# Altium PCB shield_can-display.PcbDoc (part 1 of 2)
Units mm, origin at the board's own origin, x right, y up, seen from the top; angles counter-clockwise.
Board outline 185 x 125 mm, 2 copper layers (Top Layer, Bottom Layer), stack 1.57 mm thick; 102 components, 185 nets, 477 pads, 180 vias.
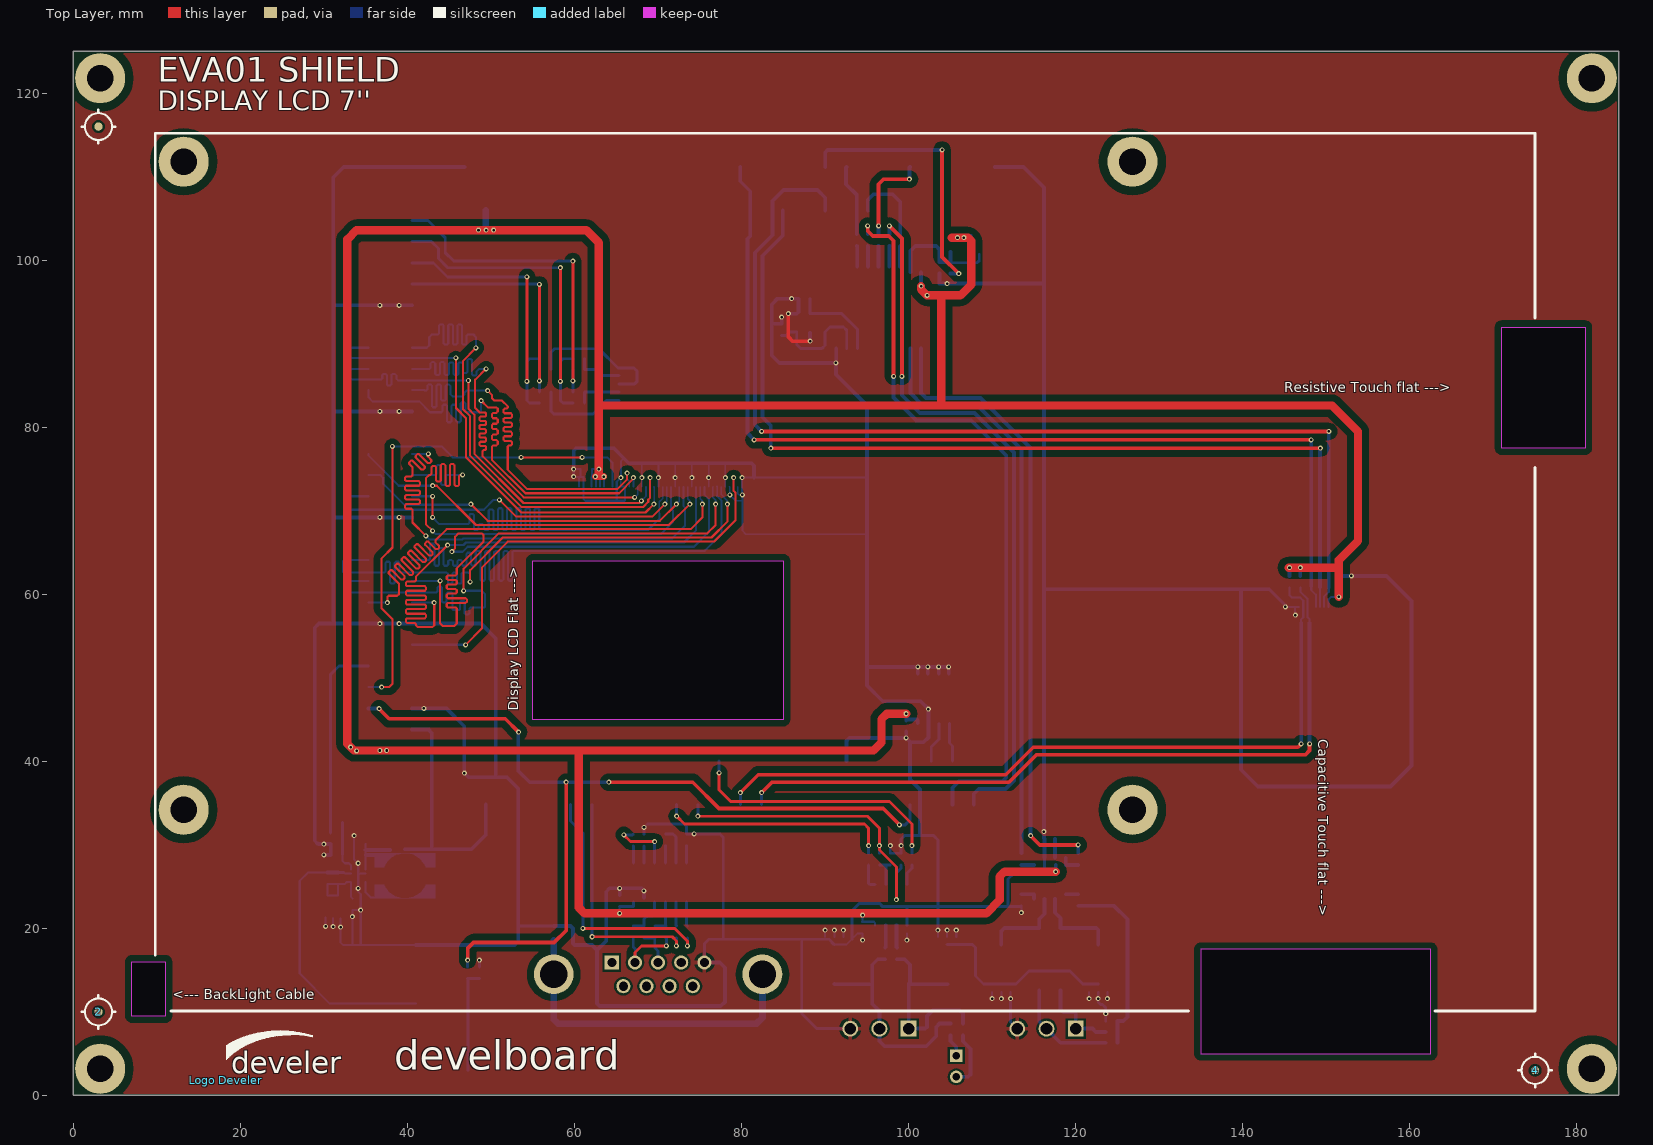
[diagram p0: Top Layer view]
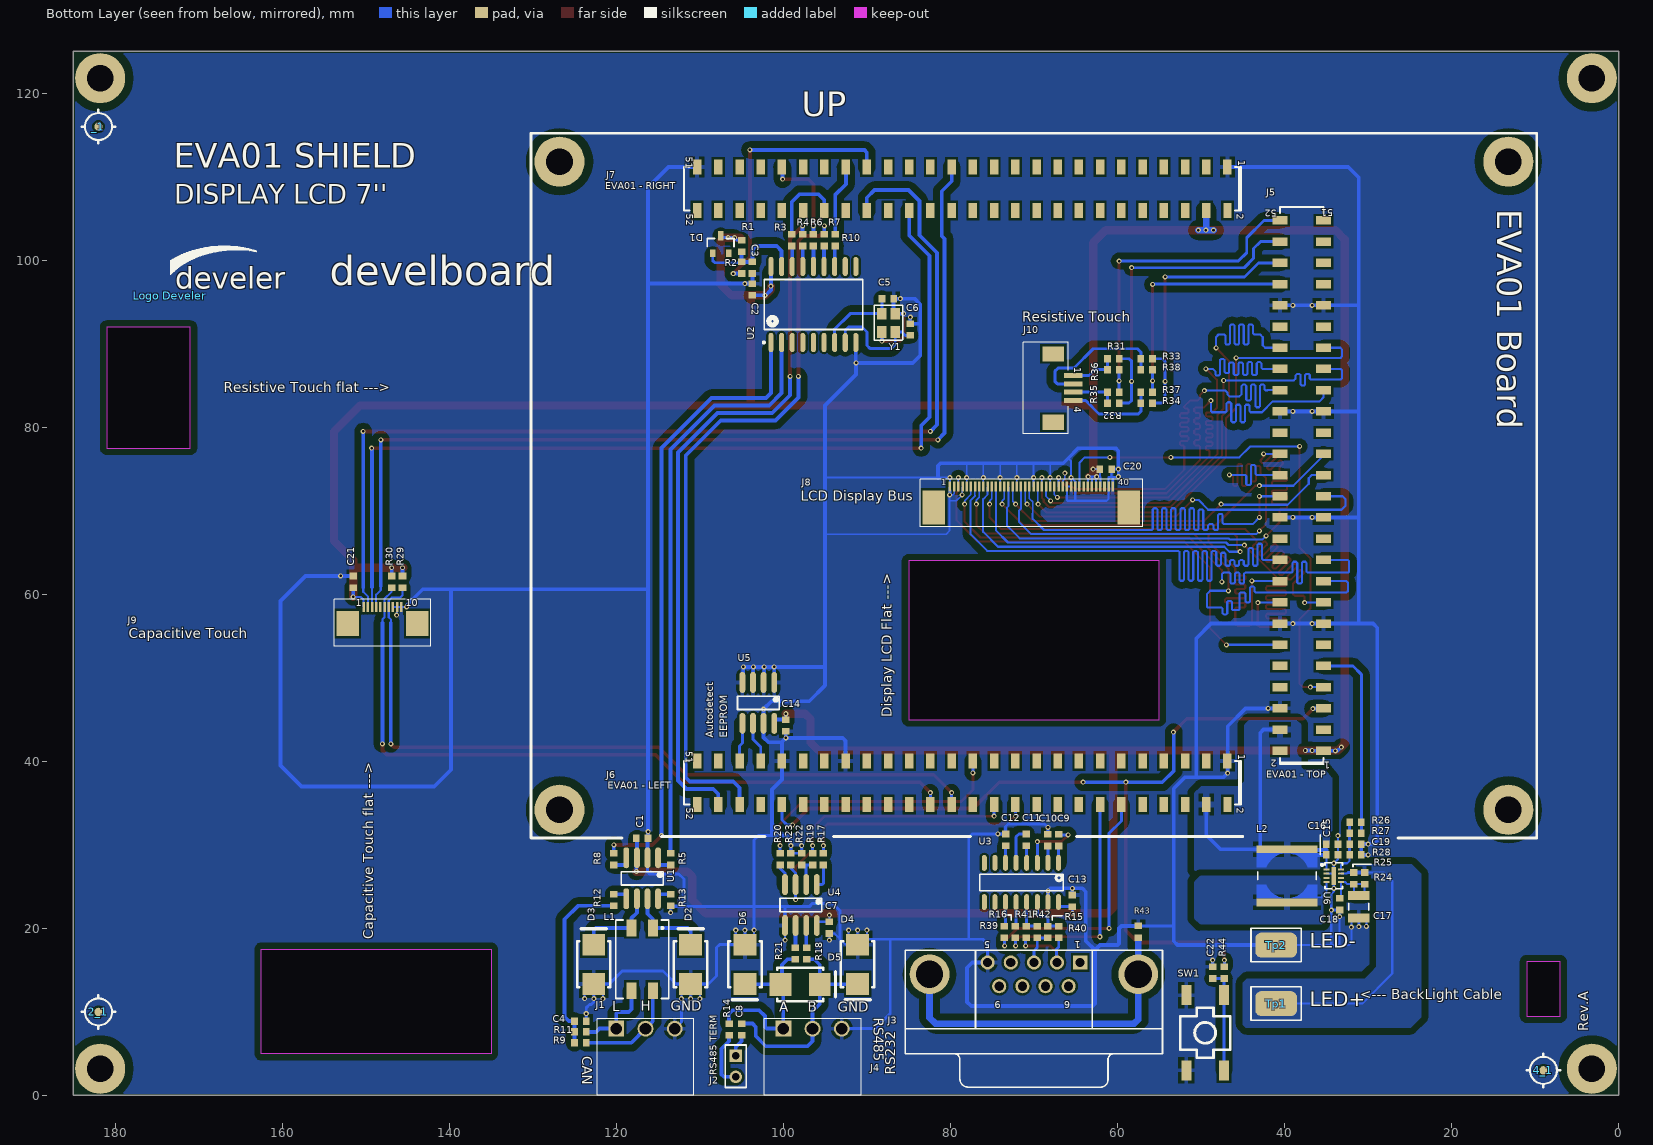
[diagram p1: Bottom Layer view, seen from below]

## Layer stack, top to bottom
Top Solder: solder mask 0.0102, Solder Resist, Dk 3.5
Top Layer: signal copper 0.035
Dielectric1: core 1.5, FR-4, Dk 4.2
Bottom Layer: signal copper 0.035
Bottom Solder: solder mask 0.0102, Solder Resist, Dk 3.5

## Board outline
0,0 0,125 185,125 185,0
cut-out: 171,92 181,92 181,77.5 171,77.5
cut-out: 55,64 85,64 85,45 55,45
cut-out: 7,16 11,16 11,9.5 7,9.5
cut-out: 162.5,5 162.5,17.5 135,17.5 135,5

## Design rules (kind name [scope] priority, off if disabled: settings)
Clearance Clearance_shld [(ObjectKind = 'Pad') And (Net = 'SHLD')] p1: gap=0.8 except(0.5: Track-SMDPad SMDPad-SMDPad)
Clearance Clearance_hole [(ObjectKind = 'Pad') And (Net = 'No Net') And (AsMM(HoleDiameter) = 3.2)] p2: gap=1
Clearance Clearance_poly [inpoly] p3: gap=0.25 except(0.8: Arc-Fill Arc-Poly Arc-Region Track-Fill Track-Poly Track-Region Poly-Poly Poly-Region Region-Region)
Clearance Clearance_80 [(ObjectKind = 'Track') And (AsMM(Width) = 0.8)] p4: gap=0.8
Clearance Clearance_45 [(ObjectKind = 'Track') And (AsMM(Width) = 0.45)] p5: gap=0.45
Clearance Clearance_35 [(ObjectKind = 'Track') And (AsMM(Width) = 0.35)] p6: gap=0.35
Clearance Clearance_com [incomponent('j8','j9','U6')] p7: gap=0.15
Clearance [All] p8: gap=0.25
ComponentClearance [All] p1: gap=0.25 collisioncheckmode=3 verticalgap=0.25 showdistances=FALSE
HoleSize [All] p1: absolutevalues=TRUE maxlimit=10 minlimit=0.2 maxpercent=80.000 minpercent=20.000
HoleToHoleClearance [All] p1: gap=0.25 allowstackedmicrovias=TRUE
Length Length_PA2 [InNet('PA2_LCDDAT2_G1_TXCK_E6')] p1: maxlimit=60.9 minlimit=56.9
Length Length_PA3 [InNet('PA3_LCDDAT3_G1_RXCK_C6')] p2: maxlimit=69.3 minlimit=65.3
Length Length_PA4 [InNet('PA4_LCDDAT4_G1_TXEN_D6')] p3: maxlimit=61 minlimit=57
Length Length_PA5 [InNet('PA5_LCDDAT5_G1_TXER_B6')] p4: maxlimit=66.6 minlimit=64.6
Length Length_PA6 [InNet('PA6_LCDDAT6_G1_CRS_A6')] p5: maxlimit=65.2 minlimit=61.2
Length Length_PA7 [InNet('PA7_LCDDAT7_E5')] p6: maxlimit=61.7 minlimit=57.7
Length Length_PA10 [InNet('PA10_LCDDAT10_G1_RXDV_F5')] p7: maxlimit=48.5 minlimit=43.5
Length Length_PA11 [InNet('PA11_LCDDAT11_G1_RXER_D5')] p8: maxlimit=71.7 minlimit=67.7
Length Length_PA12 [InNet('PA12_LCDDAT12_G1_RX0_G5')] p9: maxlimit=48.3 minlimit=44.3
Length Length_PA13 [InNet('PA13_LCDDAT13_G1_RX1_C5')] p10: maxlimit=74.3 minlimit=70.3
Length Length_PA14 [InNet('PA14_LCDDAT14_G1_TX0_E4')] p11: maxlimit=51.1 minlimit=47.1
Length Length_PA15 [InNet('PA15_LCDDAT15_G1_TX1_B5')] p12: maxlimit=75.4 minlimit=71.4
Length Length_PA18 [InNet('PA18_LCDDAT18_G1_RX2_G4')] p13: maxlimit=76.8 minlimit=72.8
Length Length_PA19 [InNet('PA19_LCDDAT19_G1_RX3_C4')] p14: maxlimit=88.2 minlimit=84.2
Length Length_PA20 [InNet('PA20_LCDDAT20_G1_TX2_A3')] p15: maxlimit=79.2 minlimit=75.2
Length Length_PA21 [InNet('PA21_LCDDAT21_G1_TX3_B4')] p16: maxlimit=81.6 minlimit=77.6
Length Length_PA22 [InNet('PA22_LCDDAT22_G1_MDC_B3')] p17: maxlimit=77.3 minlimit=73.3
Length Length_PA23 [InNet('PA23_LCDDAT23_G1_MDIO_A4')] p18: maxlimit=81.4 minlimit=77.4
MinimumSolderMaskSliver MinimumSolderMaskSliver_con [incomponent('j8','j9','U6')] p1: minsoldermaskwidth=0.08
MinimumSolderMaskSliver [All] p2: minsoldermaskwidth=0.1
PlaneClearance [All] p1: clearance=0.5
PlaneConnect PlaneConnect_via [isvia or hasfootprint('TEST_POINT_SMD_R5x3MM')] p1: planeconnectstyle=Direct reliefexpansion=0.508 reliefentries=4 reliefconductorwidth=0.254 reliefairgap=0.254
PlaneConnect [All] p2: planeconnectstyle=Relief reliefexpansion=0.6 reliefentries=4 reliefconductorwidth=0.35 reliefairgap=0.35
PolygonConnect PolygonConnect_via [isvia or hasfootprint('TEST_POINT_SMD_R5x3MM')] p1: connectstyle=Direct reliefconductorwidth=0.254 reliefentries=4 polygonreliefangle="90 Angle" airgapwidth=0.254
PolygonConnect PolygonConnect_gnd [InNet('gnd')] p2: connectstyle=Relief reliefconductorwidth=0.5 reliefentries=4 polygonreliefangle="90 Angle" airgapwidth=0.35
PolygonConnect PolygonConnect_ledp [InNet('LED+')] p3: connectstyle=Relief reliefconductorwidth=0.5 reliefentries=4 polygonreliefangle="90 Angle" airgapwidth=0.35
PolygonConnect PolygonConnect_5v [InNet('+5V','sw')] p4: connectstyle=Relief reliefconductorwidth=0.8 reliefentries=4 polygonreliefangle="90 Angle" airgapwidth=0.4
PolygonConnect [All] p5: connectstyle=Relief reliefconductorwidth=0.35 reliefentries=4 polygonreliefangle="90 Angle" airgapwidth=0.6
RoutingVias [All] p1: holewidth=0.3 width=0.6 viastyle="Through Hole" minholewidth=0.2 minwidth=0.35 maxholewidth=0.5 maxwidth=1
SilkToSilkClearance [All] p1: silktosilkclearance=0.1
SilkToSolderMaskClearance [IsPad] p1: minsilkscreentomaskgap=0.15 clearancetoexposedcopper=TRUE
SolderMaskExpansion SolderMaskExpansion_via [isVia] p1: expansion=-10
SolderMaskExpansion [All] p2: expansion=0.05
Width [All] p1: maxlimit=5 minlimit=0.15 preferedwidth=0.35
22 further rules are at their usual default settings.

## Classes and differential pairs
net class lcd: PA2_LCDDAT2_G1_TXCK_E6 PA3_LCDDAT3_G1_RXCK_C6 PA4_LCDDAT4_G1_TXEN_D6 PA5_LCDDAT5_G1_TXER_B6 PA6_LCDDAT6_G1_CRS_A6 PA7_LCDDAT7_E5 PA10_LCDDAT10_G1_RXDV_F5 PA11_LCDDAT11_G1_RXER_D5 PA12_LCDDAT12_G1_RX0_G5 PA13_LCDDAT13_G1_RX1_C5 PA14_LCDDAT14_G1_TX0_E4 PA15_LCDDAT15_G1_TX1_B5 PA18_LCDDAT18_G1_RX2_G4 PA19_LCDDAT19_G1_RX3_C4 PA20_LCDDAT20_G1_TX2_A3 PA21_LCDDAT21_G1_TX3_B4 PA22_LCDDAT22_G1_MDC_B3 PA23_LCDDAT23_G1_MDIO_A4
net class Power: +3.3V +5V GND VBATT

## Components (designator, comment, footprint, x,y, rotation, side; value= is the part's Value field where it differs from the comment)
2 "" Fiducial_mark 3,10 r0 top
2_1 "" Fiducial_mark 182,10 r180 bottom
4 "" Fiducial_mark 175,3 r0 top
4_1 "" Fiducial_mark 9,3 r180 bottom
_1 "" Fiducial_mark 182,116 r180 bottom
C1 "100nF" 0603_[1608] 116.9,30.8 r0 bottom
C2 "100nF" 0603_[1608] 103.7,96.5 r270 bottom
C3 "100nF" 0603_[1608] 103.7,99.1 r270 bottom
C4 "100nF" 0603_[1608] 124.3,8.9 r0 bottom
C5 "15pF" 0603_[1608] 87.5,95.4 r180 bottom
C6 "15pF" 0603_[1608] 84.8,91.7 r270 bottom
C7 "100nF" 0603_[1608] 94.5,20.1 r90 bottom
C8 "100nF" 0603_[1608] 105,7.9 r90 bottom
C9 "100nF" 0603_[1608] 67.029,30.575 r90 bottom
C10 "100nF" 0603_[1608] 68.329,30.575 r270 bottom
C11 "100nF" 0603_[1608] 70.9,30.6 r270 bottom
C12 "100nF" 0603_[1608] 73.4,30.6 r270 bottom
C13 "100nF" 0603_[1608] 65.4,23.3 r270 bottom
C14 "100nF" 0603_[1608] 99.7,44.3 r90 bottom
C15 "100nF" 0603_[1608] 34.3,30.1 r0 bottom
C16 "1uF" 0603_[1608] 34.3,28.8 r0 bottom
C17 "2.2uF" 1210_[3225] 31.1,22.6 r90 bottom
C18 "100nF" 0603_[1608] 33.4,22.9 r90 bottom
C19 "100nF" 0603_[1608] 31.5,30.1 r0 bottom
C20 "100nF" 0603_[1608] 61.4,75 r180 bottom
C21 "100nF" 0603_[1608] 151.5,61.5 r90 bottom
C22 "100nF" 0603_[1608] 48.6,14.7 r270 bottom
D1 "BAV70" SOT-23 107.5,101.9 r90 bottom
D2 "SMBJ12CA" DO214AA_12 111.1,15.7 r270 bottom
D3 "SMBJ12CA" DO214AA_12 122.7,15.7 r270 bottom
D4 "SMBJ12CA" DO214AA_12 91.1,15.7 r90 bottom
D5 "SMBJ12CA" DO214AA_12 98,13.3 r0 bottom
D6 "SMBJ12CA" DO214AA_12 104.6,15.7 r90 bottom
J1 "CAN" TBLOCK_1X3_3.5MM_HOR_THD 116.5,8 r180 bottom
J2 "RS485 TERM" HEADER_1X2_2.54MM_THD 105.7,3.5 r270 bottom
J3 "RS232" DSUB1.385-2H9_FEMALE 70,5 r0 bottom locked
J4 "RS485" TBLOCK_1X3_3.5MM_HOR_THD 96.5,8 r180 bottom
J5 "EVA01 - TOP" SOCKET_2x26_2.54MM_SMD 37.94,73.01 r90 bottom locked
J6 "EVA01 - LEFT" SOCKET_2x26_2.54MM_SMD 78.58,37.44 r0 bottom locked
J7 "EVA01 - RIGHT" SOCKET_2x26_2.54MM_SMD 78.58,108.56 r0 bottom locked
J8 "LCD Display Bus" FCC-ZIF_40PIN_0.5MM 70.3,71.9 r180 bottom locked
J9 "Capacitive Touch" fcc-zif_10pin_0.5mm 148,57.5 r180 bottom locked
J10 "Resistive Touch" fcc-zif_4pin_1mm 66.5,84.7 r270 bottom
L1 "WE 744222" WE-SL2 116.9,16.3 r270 bottom
L2 "22uH - WE 744062220" WE-TPC-6823-X 39.7,26.3 r90 bottom
"Logo Develer" "" Develer_logo_15x6mm 18.3,1.8 r0 top
"Logo Develer" "" Develer_logo_15x6mm 173.383,95.773 r180 bottom
R1 "100K" 0603_[1608] 105,101.7 r270 bottom
R2 "22R" 0603_[1608] 105,99.1 r270 bottom
R3 "22R" 0603_[1608] 99,102.4 r270 bottom
R4 "22R" 0603_[1608] 97.7,102.4 r270 bottom
R5 "22R" 0603_[1608] 113.5,28.3 r270 bottom
R6 "22R" 0603_[1608] 96.4,102.4 r270 bottom
R7 "22R" 0603_[1608] 95.1,102.4 r270 bottom
R8 "22R" 0603_[1608] 120.3,28.3 r270 bottom
R9 "56R" 0603_[1608] 124.3,6.3 r0 bottom
R10 "22R" 0603_[1608] 93.8,102.4 r270 bottom
R11 "56R" 0603_[1608] 124.3,7.6 r0 bottom
R12 "0R" 0603_[1608] 120.3,23.4 r270 bottom
R13 "1K" 0603_[1608] 113.5,23.4 r90 bottom
R14 "120R" 0603_[1608] 106.5,7.9 r90 bottom
R15 "NP" 0603_[1608] 68.329,19.575 r270 bottom
R16 "22R" 0603_[1608] 72.229,19.575 r90 bottom
R17 "22R" 0603_[1608] 95.2,28.3 r90 bottom
R18 "22R" 0603_[1608] 97.2,17 r270 bottom
R19 "NP" 0603_[1608] 96.5,28.3 r90 bottom
R20 "22R" 0603_[1608] 100.4,28.3 r90 bottom
R21 "22R" 0603_[1608] 98.6,17 r270 bottom
R22 "10K" 0603_[1608] 97.8,28.3 r270 bottom
R23 "10K" 0603_[1608] 99.1,28.3 r270 bottom
R24 "1R5 1%" 0603_[1608] 30.4,26 r270 bottom
R25 "6R8 1%" 0603_[1608] 31.7,26 r270 bottom
R26 "390K 1%" 0603_[1608] 31.5,32.7 r180 bottom
R27 "820K 1%" 0603_[1608] 31.5,31.4 r0 bottom
R28 "220K 1%" 0603_[1608] 31.5,28.8 r180 bottom
R29 "4K7" 0603_[1608] 145.6,61.5 r270 bottom
R30 "4K7" 0603_[1608] 146.9,61.5 r270 bottom
R31 "0R" 0603_[1608] 60.5,88.2 r180 bottom
R32 "NP" 0603_[1608] 60.5,82.9 r180 bottom
R33 "0R" 0603_[1608] 56.5,88.2 r180 bottom
R34 "NP" 0603_[1608] 56.5,82.9 r180 bottom
R35 "0R" 0603_[1608] 60.5,84.2 r180 bottom
R36 "NP" 0603_[1608] 60.5,86.9 r180 bottom
R37 "0R" 0603_[1608] 56.5,84.2 r180 bottom
R38 "NP" 0603_[1608] 56.5,86.9 r180 bottom
R39 "22R" 0603_[1608] 73.529,19.575 r90 bottom
R40 "22R" 0603_[1608] 67.029,19.575 r270 bottom
R41 "NP" 0603_[1608] 70.929,19.575 r270 bottom
R42 "22R" 0603_[1608] 69.629,19.575 r270 bottom
R43 "NP (0R)" 0603_[1608] 57.5,19.6 r270 bottom
R44 "22R" 0603_[1608] 47.2,14.7 r90 bottom
SW1 "RESET" TACTILE_SWITCH_6x6MM_SMD 49.5,7.5 r180 bottom
Tp1 "LED+" TEST_POINT_SMD_R5x3MM 41,11 r90 bottom
Tp2 "LED-" TEST_POINT_SMD_R5x3MM 41,18 r90 bottom
U1 "SN65HVD230" SOIC8 116.9,26 r270 bottom
U2 "MCP2515-I/SO" SOIC18 96.4,94.7 r90 bottom
U3 "ST3232EBDR" SOIC16 71.5,25.5 r270 bottom
U4 "SN65HVD12" SOIC8 97.9,22.8 r270 bottom
U5 "24C128" SOIC8 103,47 r270 bottom
U6 "LT3591EDDB" PQFN50P300X200X75_HS-9L 34.1,26.3 r270 bottom
Y1 "16MHz" CRYSTAL_3.2X2.5MM_4P_SMD 87.4,92.5 r90 bottom
? "" Fiducial_mark 3,116 r0 top

## Footprints (in the part's own frame and the unit in brackets; to place one, negate y for a bottom-side part, rotate by r counter-clockwise, add the part's x,y. Pads: shape width x height; smd on the part's side, far side on the other; paste and mask are expansions set on the pad)
0603_[1608] [mm] "Chip Capacitor, Body 1.6x0.8mm, IPC High Density"
  rect 0.8x0.9 smd: 1(-0.7,0) 2(0.7,0)
  body extent -0.75,-0.4 0.75,0.4, height 0.67
1210_[3225] [mm] "Chip Resistor, Body 3.2x2.5mm, IPC High Density"
  rect 1.1x2.6 smd: 1(-1.35,0) 2(1.35,0)
  silkscreen extent -0.4,-1.2 0.4,1.2, body extent -1.6,-1.25 1.6,1.25, height 1.7
CRYSTAL_3.2X2.5MM_4P_SMD [mil] "quarz crystal smd 4 lead"
  rect 55.1x45.27 smd: 1(-43.3,-31.5) 2(43.3,-31.5) 3(43.3,31.5) 4(-43.3,31.5)
  silkscreen extent -83,-67 83,67, body extent -63,-49 63,49, height 31
Develer_logo_15x6mm [mm]
  silkscreen extent 0,2.47 10.36,5.98
DO214AA_12 [mil]
  rect 103x108 smd: 1(-92.5,0) 2(92.5,0)
  silkscreen extent -167,-79 108,79, body extent -110,-78 110,78, height 106
DSUB1.385-2H9_FEMALE [mm] "Connector; D Subminiature; 9 Position; Right Angle; Pitch 1.385 mm"
  rect 1.69x1.69 hole 1.09: 1(-5.54,-10.92)
  round 1.69 hole 1.09: 2(-2.77,-10.92) 3(0,-10.92) 4(2.77,-10.92) 5(5.54,-10.92) 6(-4.155,-8.08) 7(-1.385,-8.08) 8(1.385,-8.08) 9(4.155,-8.08)
  round 4.76 hole 3.26: 10(-12.495,-9.5) 11(12.495,-9.5)
  silkscreen extent -15.4,-12.4 15.4,3.13, body extent -15.4,-12.42 15.4,6.08, height 12.75
fcc-zif_4pin_1mm [mm] "4 pins"
  rect 0.6x2.2 smd: 1(-1.5,1.2) 2(-0.5,1.2) 3(0.5,1.2) 4(1.5,1.2)
  rect 1.8x2.6 smd: Z1(-4.1,-1.2) Z2(4.1,-1.2)
  silkscreen extent -5.5,-4.8 5.5,0.6, body extent -5.5,-4.8 5.5,2.3, height 2.97
fcc-zif_10pin_0.5mm [mm] "10 pins"
  rect 0.3x1.2 smd: 1(-2.25,0.99) 2(-1.75,0.99) 3(-1.25,0.99) 4(-0.75,0.99) 5(-0.25,0.99) 6(0.25,0.99) 7(0.75,0.99) 8(1.25,0.99) 9(1.75,0.99) 10(2.25,0.99)
  rect 2.7x3 smd: Z1(-4.18,-0.99) Z2(4.18,-0.99)
  silkscreen extent -5.8,-3.71 5.8,1.89, body extent -5.7,-3.71 5.7,1.39, height 2.06
FCC-ZIF_40PIN_0.5MM [mm] "40 pins"
  rect 0.3x1.2 smd: 1(-9.75,0.99) 2(-9.25,0.99) 3(-8.75,0.99) 4(-8.25,0.99) 5(-7.75,0.99) 6(-7.25,0.99) 7(-6.75,0.99) 8(-6.25,0.99) 9(-5.75,0.99) 10(-5.25,0.99) 11(-4.75,0.99) 12(-4.25,0.99) 13(-3.75,0.99) 14(-3.25,0.99) 15(-2.75,0.99) 16(-2.25,0.99) 17(-1.75,0.99) 18(-1.25,0.99) 19(-0.75,0.99) 20(-0.25,0.99) 21(0.25,0.99) 22(0.75,0.99) 23(1.25,0.99) 24(1.75,0.99) 25(2.25,0.99) 26(2.75,0.99) 27(3.25,0.99) 28(3.75,0.99) 29(4.25,0.99) 30(4.75,0.99) 31(5.25,0.99) 32(5.75,0.99) 33(6.25,0.99) 34(6.75,0.99) 35(7.25,0.99) 36(7.75,0.99) 37(8.25,0.99) 38(8.75,0.99) 39(9.25,0.99) 40(9.75,0.99)
  rect 2.7x4.1 smd: Z1(-11.68,-1.5) Z2(11.68,-1.5)
  silkscreen extent -13.3,-3.8 13.3,1.89, body extent -13.2,-3.8 13.2,1.3, height 2.06
Fiducial_mark [mm]
  round 1 smd mask+0.95: "Fiducial Mark"(0,0)
  silkscreen extent -2,-2 2,2
HEADER_1X2_2.54MM_THD [mm] "Connector; Header; 2 Position"
  rect 1.5x1.5 hole 0.9: 1(-1.27,0)
  round 1.5 hole 0.9: 2(1.27,0)
  silkscreen extent -2.54,-1.27 2.54,1.27, body extent -2.54,-1.25 2.44,1.25, height 8.2
PQFN50P300X200X75_HS-9L [mm] "PQFN, 8-Leads, Body 3,00x2,00mm, Pitch 0,50mm, Thermal Pad 2,15x0,56mm, IPC High Density"
  rrect50% 0.25x0.7 smd: 1(-0.75,-0.875) 2(-0.25,-0.875) 3(0.25,-0.875) 4(0.75,-0.875) 5(0.75,0.875) 6(0.25,0.875) 7(-0.25,0.875) 8(-0.75,0.875)
  rect 2.15x0.56 smd: 9(0,0)
  silkscreen extent -1.55,-1.53 1.55,1.05, body extent -1.55,-1.05 1.55,1.05, height 0.75
SOCKET_2x26_2.54MM_SMD [mil] "52pin"
  rect 40x71 smd: 1(-1250,-102.36) 3(-1150,-102.36) 4(-1150,102.36) 5(-1050,-102.36) 6(-1050,102.36) 7(-950,-102.36) 8(-950,102.36) 9(-850,-102.36) 10(-850,102.36) 11(-750,-102.36) 12(-750,102.36) 13(-650,-102.36) 14(-650,102.36) 15(-550,-102.36) 16(-550,102.36) 17(-450,-102.36) 18(-450,102.36) 19(-350,-102.36) 20(-350,102.36) 21(-250,-102.36) 22(-250,102.36) 23(-150,-102.36) 24(-150,102.36) 25(-50,-102.36) 26(-50,102.36) 27(50,-102.36) 28(50,102.36) 29(150,-102.36) 30(150,102.36) 31(250,-102.36) 32(250,102.36) 33(350,-102.36) 34(350,102.36) 35(450,-102.36) 36(450,102.36) 37(550,-102.36) 38(550,102.36) 39(650,-102.36) 40(650,102.36) 41(750,-102.36) 42(750,102.36) 43(850,-102.36) 44(850,102.36) 45(950,-102.36) 46(950,102.36) 47(1050,-102.36) 48(1050,102.36) 49(1150,-102.36) 50(1150,102.36) 51(1250,-102.36) 52(1250,102.36)
  rect 39.37x70.87 smd: 2(-1250,102.36)
  silkscreen extent -1313,-102 1313,102, body extent -1311,-132 1311,132, height 292
SOIC8 [mm] "SOIC, 8-Leads, Body 4.9x3.8mm, Pitch 1.27mm, IPC Low Density"
  oval 2.5x0.7 smd: 1(-2.45,1.905) 2(-2.45,0.635) 3(-2.45,-0.635) 4(-2.45,-1.905) 5(2.45,-1.905) 6(2.45,-0.635) 7(2.45,0.635) 8(2.45,1.905)
  silkscreen extent -0.8,-2.5 0.8,2.5, body extent -2,-2.5 2,2.5, height 1.75
SOIC16 [mm] "SOIC, 16-Leads, Body 9.9x3.9mm, Pitch 1.27mm, IPC High Density"
  oval 1.9x0.6 smd: 1(-2.35,4.445) 2(-2.35,3.175) 3(-2.35,1.905) 4(-2.35,0.635) 5(-2.35,-0.635) 6(-2.35,-1.905) 7(-2.35,-3.175) 8(-2.35,-4.445) 9(2.35,-4.445) 10(2.35,-3.175) 11(2.35,-1.905) 12(2.35,-0.635) 13(2.35,0.635) 14(2.35,1.905) 15(2.35,3.175) 16(2.35,4.445)
  silkscreen extent -1,-5 1,5, body extent -2,-5 2,5, height 1.91
SOIC18 [mm] "SOIC, 18-Leads, Body 11.5x7.5mm, Pitch 1.27mm, IPC Medium Density"
  oval 2.3x0.6 smd: 1(-4.55,5.08) 2(-4.55,3.81) 3(-4.55,2.54) 4(-4.55,1.27) 5(-4.55,0) 6(-4.55,-1.27) 7(-4.55,-2.54) 8(-4.55,-3.81) 9(-4.55,-5.08) 10(4.55,-5.08) 11(4.55,-3.81) 12(4.55,-2.54) 13(4.55,-1.27) 14(4.55,0) 15(4.55,1.27) 16(4.55,2.54) 17(4.55,3.81) 18(4.55,5.08)
  silkscreen extent -4.67,-5.9 3,6.06, body extent -3.8,-5.95 3.8,5.95, height 2.65
SOT-23 [mm] "SOT23, 3-Leads, Body 2.9x1.3mm, Pitch 0.95mm, Lead Span 2.5mm, IPC High Density"
  rect 0.9x0.65 smd: 1(-1.038,0.95) 2(-1.038,-0.95)
  rect 1.1x0.65 smd: 3(1.038,0)
  silkscreen extent -0.3,-1.6 0.7,1.6, body extent -1.2,-1.52 1.2,1.52, height 1.22
TACTILE_SWITCH_6x6MM_SMD [mm] "Tactile switch smd 4pin vertical"
  rect 1.2x2.4 smd: 1(2.25,4.5) 2(2.25,-4.5) 3(-2.25,4.5) 4(-2.25,-4.5)
  silkscreen extent -3,-3 3,3, body extent -3.1,-4.5 3.1,4.5, height 9.5
TBLOCK_1X3_3.5MM_HOR_THD [mm] "3,50mm - PCB Horizontal - 03p"
  rect 1.9x1.9 hole 1.4: 1(-3.5,0)
  round 1.9 hole 1.4: 2(0,0) 3(3.5,0)
  silkscreen extent -5.8,-8 5.8,1.2, body extent -6,-8 6,1.2, height 7.31
TEST_POINT_SMD_R5x3MM [mm] "Test point R 5MM x 3MM"
  rrect50% 3x5 smd paste-10: 1(0,0)
WE-SL2 [mm] "SMD Inductor, 4-Leads, Body 6,3x9,5mm"
  rect 2x1.2 smd: 1(-3.75,1.27) 2(-3.75,-1.27) 3(3.75,-1.27) 4(3.75,1.27)
  silkscreen extent -4.7,-3.18 4.7,3.18, body extent -4.6,-3 4.6,3, height 5
WE-TPC-6823-X [mm] "SMD Inductor, 2-Leads, Body 6,8x6,8mm"
  rect 0.95x7.3 smd: 1(-3.175,0) 2(3.175,0)
  Top Layer region: -2.7,3.65 -1.05,3.65 -1.05,2.5 -1.45,2.3 -1.6,2.2 -1.9,1.95 -2.2,1.6 -2.4,1.25 -2.55,0.95 -2.6,0.75 -2.65,0.5 -2.7,0
  Top Layer region: 2.7,3.65 1.05,3.65 1.05,2.5 1.35,2.35 1.65,2.15 2,1.85 2.3,1.45 2.55,0.95 2.65,0.55 2.7,0
  Top Layer region: 2.7,-3.65 1.05,-3.65 1.05,-2.5 1.35,-2.35 1.7,-2.1 1.95,-1.9 2,-1.85 2.2,-1.6 2.35,-1.35 2.45,-1.15 2.55,-0.9 2.6,-0.7 2.65,-0.5 2.7,0
  Top Layer region: -2.7,-3.65 -1.05,-3.65 -1.05,-2.5 -1.45,-2.3 -1.65,-2.15 -1.9,-1.95 -2.2,-1.6 -2.35,-1.35 -2.45,-1.15 -2.65,-0.55 -2.7,0
  silkscreen extent -0.45,-3.5 0.45,3.5, body extent -3.4,-3.4 3.4,3.4, height 2.29

## Part data
C1 C2 C3 C4 C7 C8 C9 C10 C11 C12 C13 C14 C15 C18 C19 C20 C21 C22: library part Cap, "Ceramic X7R 50V"
C5 C6: library part Cap, "Ceramic 50V NP0/C0G"
C16: library part Cap, "Ceramic X7R, X5R 16V"
C17: library part Cap, "Ceramic X7R, X5R 50V"
D1: "Diode"
D2 D3 D4 D5 D6: library part "TVS bi", "TVS bidirectional"
J1 J4: library part "Header 3", "Terminal block Header 3.5mm Horizontal (WE 691322110003)"
J2: library part "Header 2", "Pin Header, 2.54mm, 1x2, 2pin"
J3: library part "D Connector 9", "Receptacle Assembly, 9 Position, Right Angle (WE 618009231421)"
J5: library part "Header 26x2", "Socket Header, 26 pin, 13x2, 2.54mm, H=8.5mm"
J6 J7: library part "Header 26x2", "Pin header 26x2"
J8: library part "Header 40", "40-pin, 0.5mm, SMT, ZIF, Horizontal, Bottom Contact (Molex 54132-4062; WE 68714014522)"
J9: library part "Header 10", "10-pin, 0.5mm, SMT, ZIF, Horizontal, Bottom Contact (Molex 52746-1071; WE 68711014522)"
J10: library part "Header 4", "4-pin, 0.5mm, SMT, ZIF, Horizontal, Top Contact (Molex 52207-0433; WE 68610414122)"
L1: library part "WE-CMB XS, 744821240", "Common Mode line Filter"
L2: library part Inductor, "Power Inductor"
R1 R2 R3 R4 R5 R6 R7 R8 R9 R10 R11 R12 R13 R14 R15 R16 R17 R18 R19 R20 R21 R22 R23 R26 R27 R28 R31 R32 R33 R34 R35 R36 R37 R38 R39 R40 R41 R42 R43 R44: library part Res1, "Resistor"
R24 R25 R29 R30: library part Res1, "Resistor 0.125W"
SW1: library part tactile_switch, "Tactile switch"
Tp1 Tp2: library part Test_point
U1: "3.3V CAN bus transceiver (SN65HVD231; SN65HVD232)"
U2: library part MCP2515, "Stand-Alone CAN controller with SPI interface"
U3: library part ST3232CDR, "3 to 5.5 V, low power, up to 400 kbps RS-232 driver"
U4: "3.3V to RS485 interface"
U5: library part EEPROM-SOIC8, "EEPROM"
U6: library part LT3591, "White LED Driver with Integrated Schottky"
Y1: library part CRYSTAL-4p, "Crystal"

## Free pads (board coordinates)
  round 6 hole 3.2: Hole(3.2,3.2) Hole(3.2,121.8) Hole(13.2,34.2) Hole(13.2,111.8) Hole(126.8,34.2) Hole(126.8,111.8) Hole(181.8,3.2) Hole(181.8,121.8)

## Via types
v1: diameter 0.6, hole 0.3, Top Layer to Bottom Layer, 180 vias

## Nets (pads, with @x,y where several pads share a name; then routed paths per layer and width w, separated by ;. In a path a pad name is that pad's centre, name@x,y a point inside that pad or via, vN(x,y) a via of type N, cw(c..) or ccw(c..) an arc to the next point about the centre after c; other vN are vias at no path point)
+1.8V: J7.49
+3.3V: C1.2 C2.2 C7.2 C13.2 C14.2 C20.1 C21.1 D1.3 J5.1 J7.4 J8.34 J8.35 J8.36 J8.37 J9.1 R1.1 R29.1 R30.1 U1.3 U2.18 U3.16 U4.8 U5.8 | length 458.7
  Top Layer w0.8: v1(62.5,74.1) v1(63.5,74.1)
  Top Layer w1: 62.9,74.2 v1(62.9,75) 62.9,82.6 ; v1(99.7,45.7) 97.4,45.7 96.75,45.05 96.75,42.25 95.8,41.3 60.5,41.3 ; v1(101.48,96.9) 101.48,96.52 v1(102.2,95.8) 103.9,95.8 ; 105.175,102.7 v1(105.85,102.7) v1(106.6,102.7) 107.1,102.7 107.5,102.3 107.5,97.1 106.2,95.8 103.9,95.8 ; v1(117.6,26.8) 111.5,26.8 110.9,26.2 110.9,23.4 109.3,21.8 v1(65.4,21.8) 61.2,21.8 60.5,22.5 60.5,41.3 ; v1@145.5,63.2 v1(145.6,63.2) v1(146.9,63.2) 151.5,63.2 ; v1(151.5,59.7) 151.5,63.2 ; 60.5,41.3 v1(37.5,41.3) v1(36.7,41.3) 33.6,41.3 v1(33.2,41.7) 32.8,42.1 32.8,102.5 33.9,103.6 v1(48.5,103.6) v1(49.4,103.6) v1(50.3,103.6) 61.4,103.6 62.9,102.1 62.9,82.6 ; 62.9,82.6 103.9,82.6 ; 103.9,82.6 103.9,95.8 ; 103.9,82.6 150.7,82.6 153.8,79.5 153.8,66.4 151.5,64.1 151.5,63.2
  Bottom Layer w0.25: J8.37@62.05,72.89 62.05,74.05 62.1,74.1 ; J8.36@62.55,72.89 v1@62.55,74.05 ; v1(62.9,75) C20.1@62.1,75 62.1,74.1 ; J8.35@63.05,72.89 63.05,74.05 ; J8.34@63.55,72.89 63.55,74.05 v1(63.5,74.1) v1(62.5,74.1) 62.1,74.1 ; v1(65.4,21.8) C13.2@65.4,22.6 ; C7.2@94.5,20.8 v1(94.5,21.6) ; U4.8@95.8,20.8 95.995,20.605 U4.8@95.995,20.35 ; J9.1@150.25,58.49 150.25,59.35 150.6,59.7 v1(151.5,59.7)
  Bottom Layer w0.35: C13.2@65.4,22.6 67.055,22.6 U3.16@67.055,23.15 ; C7.2@94.5,20.8 U4.8@95.8,20.8 ; R1.1@105,102.4 105.55,102.4 v1(105.85,102.7) v1(106.6,102.7) 107.263,102.7 D1.3@107.5,102.938
  Bottom Layer w0.45: v1(33.2,41.7) 33.64,41.26 v1(33.9,41.26) J5.1@35.34,41.26 36.66,41.26 v1(36.7,41.3) v1(37.5,41.3) ; C14.2@99.7,44.9 C14.2@99.7,45 ; v1(99.7,45.7) C14.2@99.7,45 ; U5.8@101.095,44.55 101.095,44.905 101,45 C14.2@99.7,45 ; U2.18@101.48,98.55 101.48,96.42 102.1,95.8 C2.2@103.7,95.8 ; U1.3@117.535,28.45 C1.2@117.535,30.735 ; v1(117.6,26.8) U1.3@117.6,27.6 ; R29.1@145.6,62.2 v1(145.6,63.2) ; R30.1@146.9,62.2 v1(146.9,63.2) ; v1(151.5,59.7) C21.1@151.5,60.8
  Bottom Layer w0.8: v1(48.5,103.6) v1(49.4,103.6) ; J7.4@49.37,105.96 49.37,103.63 v1(49.4,103.6) ; v1(50.3,103.6) v1(49.4,103.6)
+5V: C15.2 C16.2 J5.4 J6.4 L2.2 U6.1 | length 38.7
  Bottom Layer w0.25: U6.1@34.975,27.05 34.975,29.4 34.975,30.075 C15.2@35,30.1 ; 37.1,28.8 37.2,28.9
  Bottom Layer w0.45: 34.975,29.4 L2.2@37.9,29.4 ; C16.2@35,28.8 37.1,28.8 ; L2.2@39.7,29.475 L2.2@42.9,29.475 ; J5.4@40.54,43.8 42.5,43.8 42.9,43.4 L2.2@42.9,29.475 ; J6.4@49.37,34.84 49.37,31.17 47.675,29.475 L2.2@42.9,29.475
ADCREF_EXT: J6.46
BOOT_RECOVERY: J6.52
GND: C1.1 C2.1 C3.2 C4.1 C5.2 C6.1 C7.1 C10.1 C12.1 C13.1 C14.1 C15.1 C16.1 C17.1 C18.1 C19.1 C20.2 C21.2 C22.1 D2.2 D3.2 D4.2 D6.2 J1.3 J3.5 J4.3 J5.6 J5.13 J5.14 J5.23 J5.24 J5.33 J5.34 J5.43 J5.44 J6.1 J6.37 J6.43 J7.1 J7.51 J8.1 J8.2 J8.4 J8.5 J8.9 J8.13 J8.17 J8.21 J8.25 J8.29 J8.30 J8.31 J8.39 J8.40 J9.8 J9.9 J9.10 R13.1 R22.1 R23.1 R28.2 R43.1 SW1.3 SW1.4 Tp2.1 U1.2 U2.9 U3.15 U4.5 U5.1 U5.2 U5.3 U5.4 U5.7 U6.2 U6.9 Y1.2 Y1.4 | length 899.6
  Top Layer w0.45: v1(85.6,93.6) 85.6,90.8 86.1,90.3 v1(88.2,90.3)
  Bottom Layer w0.2: J8.30@65.55,72.89 v1(65.55,73.98) ; J8.25@68.05,72.89 v1(68.05,73.98) 68.05,75.7 ; J8.21@70.05,72.89 v1(70.05,73.98) 70.05,75.7 ; J8.17@72.05,72.89 v1(72.05,73.98) 72.05,75.7 ; J8.13@74.05,72.89 v1(74.05,73.98) 74.05,75.7 ; J8.9@76.05,72.89 v1(76.05,73.98) 76.05,75.7 ; J8.5@78.05,72.89 v1(78.05,73.98) 78.05,75.7 ; J8.4@78.55,72.89 78.6,72.84 v1(78.6,71.9) 79.3,71.2 80.1,71.2 ; J8.2@79.55,72.89 79.55,72.05 79.7,71.9 v1(80.1,71.9) 80.1,71.2 ; 95,67.2 80.5,67.2 80.1,67.6 80.1,71.2
  Bottom Layer w0.25: v1(30.2,20.25) C17.1@30.2,21.3 ; v1(31.1,20.2) C17.1@31.1,21.25 ; C17.1@32,21.2 v1(32,20.15) 32,18.3 32.3,18 33.4,18 ; v1(33.6,31.1) C15.1@33.6,30.1 C16.1@33.6,28.8 33.6,28.3 v1(34.1,27.8) U6.9@34.1,26.3 ; U6.2@34.975,26.55 34.35,26.55 U6.9@34.1,26.3 ; Tp2.1@41,18 34.4,18 ; J8.40@60.55,72.89 60.55,74.05 ; J8.30@65.55,72.89 J8.29@66.05,72.89 66.05,71.25 66,71.2 65,71.2 ; 65.9,76.3 65.55,75.95 v1(65.55,73.98) 65.05,73.48 J8.31@65.05,72.89 65.05,71.25 65,71.2 ; v1(80.1,71.9) 80.05,71.95 J8.1@80.05,72.89 v1(80.05,73.98) 81.5,73.98 94.98,73.98 95,74 ; D4.2@90,19 v1(90,19.8) ; D4.2@91.1,18.049 92.549,18.049 93.2,18.7 93.9,19.4 C7.1@94.5,19.4 v1(94.5,18.6) ; D4.2@91.1,19 v1(91.1,19.8) ; D4.2@92.2,19 v1(92.2,19.8) ; v1(99.8,18.6) U4.5@99.8,19.4 ; D6.2@103.5,19 v1(103.5,19.8) ; D6.2@104.6,19 v1(104.6,19.8) ; D6.2@105.7,19 v1(105.7,19.8) ; v1(110,11.6) D2.2@110,12.4 ; v1(111.1,11.6) D2.2@111.1,12.4 ; v1(112.2,11.6) D2.2@112.2,12.4 ; v1(113.5,21.9) R13.1@113.5,22.7 ; v1(121.6,11.6) D3.2@121.6,12.4 ; v1(122.7,11.6) D3.2@122.7,12.4 ; v1(123.8,11.6) D3.2@123.8,12.4 ; v1(145.1,58.5) 145.11,58.49 J9.10@145.75,58.49 J9.9@146.25,58.49 ; v1(146.3,57.5) 146.25,57.55 J9.9@146.25,58.49 ; J9.8@146.75,58.49 J9.9@146.25,58.49 ; 33.4,18 v1(33.4,21.4) C18.1@33.4,22.2 v1(34.4,22.2) ; 33.4,18 34.4,18 ; U6.9@34.1,26.3 v1(34.1,24.8) 34.1,24.4 34.4,24.1 v1(34.4,22.2) ; 34.4,18 v1(34.4,22.2) ; 60.55,74.05 60.7,74.05 ; 60.55,74.05 59.95,74.05 v1(59.9,74.1) v1(59.9,75) C20.2@60.7,75 60.7,74.05 ; 60.7,74.05 61.05,74.05 J8.39@61.05,72.89 61.05,71.45 61.3,71.2 65,71.2
  Bottom Layer w0.35: C22.1@48.6,15.4 v1(48.6,16.2) ; 53.267,20.4 53.367,20.3 R43.1@57.5,20.3 ; C10.1@68.329,31.275 68.329,32.071 v1(68.314,32.086) 68.729,32.5 73.1,32.5 73.4,32.2 C12.1@73.4,31.3 ; C12.1@73.504,31.3 74.3,31.3 v1(74.314,31.314) 77.386,31.314 77.8,30.9 77.8,18.8 77.7,18.7 ; J3.5@75.54,15.92 75.54,18.14 76.1,18.7 77.7,18.7 ; D4.2@91.1,18.049 90.45,18.7 87.2,18.7 ; J4.3@93,8 89,8 87.2,9.8 87.2,18.7 ; 93.2,18.7 93.2,22.1 94.1,23 96.5,23 96.9,22.6 99.8,22.6 ; v1(97.8,29.9) R22.1@97.8,29 R23.1@99.1,29 v1(99.1,29.9) 99.1,30.7 99.5,31.1 103,31.1 103.5,30.6 103.5,22.6 ; U4.5@99.805,20.35 99.8,20.355 99.8,22.6 ; v1(103.5,19.8) 103.5,22.6 ; D6.2@104.6,18.049 107.651,18.049 108,17.7 108,14.3 108.95,13.35 D2.2@111.1,13.35 112.851,13.35 114.4,14.9 119.3,14.9 120.85,13.35 D3.2@122.7,13.35 ; v1(112.2,11.6) 112.2,8.8 J1.3@113,8 ; R13.1@113.5,22.7 113.4,22.6 111.9,22.6 ; U1.2@116.265,28.45 116.265,26.737 116.053,26.525 112.525,26.525 111.9,25.9 111.9,22.6 ; v1(122.7,11.6) 122.7,11.2 123,10.9 123.2,10.9 123.6,10.5 v1(123.6,9.8) C4.1@123.6,8.9 ; 77.7,18.7 87.2,18.7 ; 99.8,22.6 103.5,22.6 ; 103.5,22.6 111.9,22.6
  Bottom Layer w0.45: v1(30,28.8) R28.2@30.8,28.8 C19.1@30.8,30.1 v1(30,30.1) 29.3,30.1 28.9,30.5 28.9,56 29.4,56.5 31.2,56.5 ; J5.6@40.54,46.34 v1(41.96,46.34) 44.66,46.34 46.8,44.2 v1(46.8,38.6) 47.3,38.1 50.7,38.1 ; J5.24@40.54,69.2 J5.23@35.34,69.2 31.2,69.2 31.1,69.3 ; J5.34@40.54,81.9 J5.33@35.34,81.9 31.2,81.9 31.1,81.8 ; J5.44@40.54,94.6 J5.43@35.34,94.6 31.2,94.6 31.1,94.5 ; Tp2.1@41,18 52.8,18 53.267,18.467 53.267,20.4 53.267,36.733 51.9,38.1 50.7,38.1 ; J7.1@46.83,111.16 32.36,111.16 31.1,109.9 31.1,94.5 ; R43.1@57.5,20.3 59.5,20.3 59.8,20 59.8,18.2 60,18 62.1,18 62.7,17.4 ; v1(59.9,75) 59.9,77.2 60.2,77.5 64.7,77.5 65.9,76.3 66.5,75.7 68.05,75.7 70.05,75.7 72.05,75.7 74.05,75.7 76.05,75.7 78.05,75.7 81.2,75.7 81.5,75.4 81.5,73.98 ; C13.1@65.4,24 v1(65.4,24.8) ; U3.15@68.3,23.7 v1(68.3,24.5) 68,24.8 v1(65.4,24.8) ; J3.5@75.54,15.92 77.38,15.92 78,15.3 78,11.2 77.5,10.7 63,10.7 62.7,11 62.7,17.4 ; v1(84.8,93.2) C6.1@84.8,92.4 83.7,92.4 83.6,92.3 ; v1(85.6,93.6) Y1.2@86.6,93.6 86.8,93.8 C5.2@86.8,95.4 v1(86,95.4) 84.3,95.4 83.6,94.7 83.6,92.3 ; v1(88.2,90.3) Y1.4@88.2,91.3 ; U2.9@91.32,89.45 91.32,87.72 v1(91.3,87.7) ; J6.37@92.55,40.04 92.55,42.45 92.9,42.8 v1(99.7,42.8) ; C14.1@99.7,43.6 v1(99.7,42.8) ; U5.1@101.1,50.5 v1(101.1,51.3) ; 101.353,31.153 101.353,36.647 100.17,37.83 J6.43@100.17,40.04 100.17,42.27 100.2,42.3 ; U5.2@102.3,50.5 v1(102.3,51.3) ; U5.3@103.6,50.5 v1(103.6,51.3) ; C3.2@103.7,98.4 C2.1@103.7,97.2 v1(104.6,97.2) 116.2,97.2 ; U5.4@104.8,50.5 v1(104.8,51.3) v1(103.6,51.3) ; J7.51@110.33,111.16 113.74,111.16 116.2,108.7 116.2,97.2 ; C1.1@116.2,30.8 v1(116.2,31.6) 116.2,60.6 ; U1.2@116.265,28.45 C1.1@116.265,30.735 ; v1@145.1,58.685 143.185,60.6 139.8,60.6 ; C21.2@151.5,62.2 152.499,62.2 157.2,62.2 160.2,59.2 160.2,39.5 157.7,37 141.8,37 139.8,39 139.8,60.6 ; 31.1,69.3 31.1,81.8 ; 31.1,69.3 31.1,56.6 31.2,56.5 ; 31.1,81.8 31.1,94.5 ; 31.2,56.5 J5.13@35.34,56.5 39,56.5 J5.14@40.54,56.5 48.8,56.5 50.553,54.747 50.553,38.247 50.7,38.1 ; 62.7,17.4 63.8,18.5 63.8,24.4 64.2,24.8 v1(65.4,24.8) ; 83.6,92.3 83.6,88.6 84.5,87.7 v1(91.3,87.7) ; v1(91.3,87.7) 91.3,86.3 95,82.6 95,74 95,67.2 95,51.2 ; 95,51.2 95.1,51.3 v1(101.1,51.3) ; 95,51.2 95,49.1 96.9,47.2 101.429,47.2 v1(102.365,46.265) U5.7@102.365,44.55 102.365,42.865 101.8,42.3 100.2,42.3 ; v1(99.7,42.8) 100.2,42.3 ; v1(101.1,51.3) v1(102.3,51.3) ; v1(102.3,51.3) v1(103.6,51.3) ; 116.2,60.6 139.8,60.6 ; 116.2,60.6 116.2,97.2
  other v1: 36.7,56.5 39,56.5 153,62.2 36.7,69.2 39,69.2 36.7,81.9 39,81.9 36.7,94.6 39,94.6
HHSDMA_DHSDM_V14: J6.41
HHSDPA_DHSDP_W14: J6.39
JTAGSEL_V2: J6.35
LED+: R24.1 R25.1 Tp1.1 U6.7 | length 33.1
  Bottom Layer w0.25: R24.1@30.4,26.7 28.1,26.7 27.1,25.7 27.1,14.6 30.7,11 Tp1.1@41,11 ; 32.4,26.7 32.55,26.55 U6.7@33.225,26.55
  Bottom Layer w0.35: R25.1@31.7,26.7 32.4,26.7
  Bottom Layer w0.45: R24.1@30.4,26.7 R25.1@31.7,26.7
NetC3_1: C3.1 D1.1 R1.2 R2.1 U2.17 | length 14.8
  Bottom Layer w0.35: R2.1@105,99.8 105.1,99.7 108.2,99.7 108.45,99.95 D1.1@108.45,100.662
  Bottom Layer w0.45: U2.17@100.21,98.55 U2.17@100.21,99.25 100.21,101.11 100.8,101.7 103.3,101.7 103.7,101.3 C3.1@103.7,99.8 R2.1@105,99.8 R1.2@105,101
NetC4_2: C4.2 R9.2 R11.2 R12.2 | length 22.3
  Bottom Layer w0.45: R12.2@120.3,22.7 124.6,22.7 126.2,21.1 126.2,9.4 125.7,8.9 C4.2@125,8.9 R11.2@125,7.6 R9.2@125,6.3
NetC5_1: C5.1 U2.7 Y1.3 | length 10.5
  Bottom Layer w0.35: Y1.3@88.2,93.6 C5.1@88.2,95.4 ; Y1.3@88.2,93.6 92,93.6 93.86,91.74 U2.7@93.86,90.15 U2.7@93.86,89.45
NetC6_2: C6.2 U2.8 Y1.1 | length 14
  Bottom Layer w0.35: C6.2@84.8,91 85.4,91 85.8,91.4 Y1.1@86.6,91.4 86.6,89.9 87.05,89.45 89.65,89.45 90,89.8 90,91.4 90.6,92 92.2,92 92.59,91.61 U2.8@92.59,90.15 U2.8@92.59,89.45
NetC8_1: C8.1 J2.1 | length 2.7
  Bottom Layer w0.45: C8.1@105,7.2 105,6.5 105.7,5.8 J2.1@105.7,4.77
NetC8_2: C8.2 D4.1 D5.1 J4.2 R18.2 | length 26.4
  Bottom Layer w0.45: D4.1@91.1,13.35 91.151,13.3 D5.1@95.651,13.3 ; R18.2@97.2,16.3 96.3,16.3 95.651,15.651 D5.1@95.651,13.3 ; C8.2@105,8.6 103.7,8.6 103.3,8.2 103.3,7.1 102.1,5.9 97.1,5.9 96.5,6.5 J4.2@96.5,8 96.5,10.1 95.651,10.949 D5.1@95.651,13.3
NetC9_1: C9.1 U3.1 | length 2
  Bottom Layer w0.35: C9.1@67.029,29.875 67.055,29.849 U3.1@67.055,27.85
NetC9_2: C9.2 U3.3 | length 7.7
  Top Layer w0.35: v1(65.9,31.2) 66.7,30.4 v1(69.6,30.4)
  Bottom Layer w0.35: v1(65.9,31.2) 66.954,31.2 C9.2@67.029,31.275 ; U3.3@69.595,27.85 69.595,30.395 v1(69.6,30.4)
NetC10_2: C10.2 U3.2 | length 2
  Bottom Layer w0.35: U3.2@68.325,27.85 68.325,29.871 C10.2@68.329,29.875
NetC11_1: C11.1 U3.5 | length 4.5
  Bottom Layer w0.35: C11.1@70.9,31.3 71.8,31.3 72.135,30.965 U3.5@72.135,27.85
NetC11_2: C11.2 U3.4 | length 2.1
  Bottom Layer w0.35: U3.4@70.865,27.85 70.865,29.865 C11.2@70.9,29.9
NetC12_2: C12.2 U3.6 | length 2.1
  Bottom Layer w0.35: C12.2@73.4,29.9 73.405,29.895 U3.6@73.405,27.85
NetC17_2: C17.2 C18.2 R24.2 R25.2 U6.5 | length 9
  Bottom Layer w0.25: C18.2@33.4,23.6 33.225,23.775 U6.5@33.225,25.55 32.75,25.55 32.5,25.3 R25.2@31.7,25.3 ; R25.2@31.7,25.3 31.7,23.95 C17.2@31.1,23.95 30.4,23.95 R24.2@30.4,25.3 R25.2@31.7,25.3
NetC19_2: C19.2 R26.1 R27.2 R28.1 U6.8 | length 6.4
  Bottom Layer w0.25: R28.1@32.2,28.8 32.2,28.1 32.5,27.8 33,27.8 33.225,27.575 U6.8@33.225,27.05
  Bottom Layer w0.35: R28.1@32.2,28.8 R26.1@32.2,32.7
NetC22_2: C22.2 R44.1 SW1.1 SW1.2 | length 12.4
  Bottom Layer w0.35: SW1.2@47.25,3 SW1.1@47.25,12 47.25,13.95 R44.1@47.2,14 C22.2@48.6,14
NetD2_1: D2.1 L1.1 U1.7 | length 10.1
  Bottom Layer w0.45: D2.1@111.1,18.049 111.1,19.7 111.45,20.05 L1.1@115.63,20.05 115.63,21.13 116.265,21.765 U1.7@116.265,23.55
NetD3_1: D3.1 L1.2 U1.6 | length 10.1
  Bottom Layer w0.45: U1.6@117.535,23.55 117.535,21.865 118.17,21.23 L1.2@118.17,20.05 122.45,20.05 122.7,19.8 D3.1@122.7,18.049
NetD5_2: D5.2 D6.1 J4.1 R14.2 R21.2 | length 23.8
  Bottom Layer w0.45: R21.2@98.6,16.3 99.5,16.3 100.149,15.651 D5.2@100.149,13.5 ; D6.1@104.649,13.3 D5.2@100.35,13.3 100.149,13.3 D5.2@100.149,13.5 ; R14.2@106.5,8.6 106.5,9.8 106.1,10.2 102.9,10.2 102.2,9.5 102.2,8.2 102,8 J4.1@100,8 100,13.351 D5.2@100.149,13.5
NetJ1_1: J1.1 L1.3 R11.1 | length 9.8
  Bottom Layer w0.45: L1.3@118.17,12.55 118.17,10.33 118.5,10 119.8,10 120,9.8 J1.1@120,8 122,8 122.4,7.6 R11.1@123.6,7.6
NetJ1_2: J1.2 L1.4 R9.1 | length 12.7
  Bottom Layer w0.45: L1.4@115.63,12.55 115.63,8.87 J1.2@116.5,8 118.2,6.3 R9.1@123.6,6.3
NetJ2_2: J2.2 R14.1 | length 6.9
  Bottom Layer w0.45: J2.2@105.7,2.23 107.13,2.23 107.4,2.5 107.4,5.6 106.5,6.5 R14.1@106.5,7.2
NetJ3_2: J3.2 R40.2 R41.2 | length 9.4
  Top Layer w0.35: J3.2@67.23,15.92 67.23,17.13 68,17.9 v1(71,17.9)
  Bottom Layer w0.35: R40.2@67.029,18.875 67.029,17.771 67.3,17.5 67.3,15.99 J3.2@67.23,15.92 ; R41.2@70.929,18.875 71,18.804 v1(71,17.9)
NetJ3_3: J3.3 R15.2 R42.2 | length 4.4
  Bottom Layer w0.35: R15.2@68.329,18.875 R42.2@69.629,18.875 69.6,18.846 69.6,17.7 70,17.3 J3.3@70,15.92
NetJ10_1: J10.1 R31.1 R36.1 | length 5.7
  Bottom Layer w0.35: R31.1@61.2,88.2 R36.1@61.2,86.9 62.7,86.9 63.4,86.2 J10.1@65.3,86.2
NetJ10_2: J10.2 R33.1 R38.1 | length 17.2
  Bottom Layer w0.35: R38.1@57.2,86.9 R33.1@57.2,88.2 57.2,89 57.6,89.4 62.9,89.4 65.2,87.1 67.1,87.1 67.5,86.7 67.5,85.5 67.2,85.2 J10.2@65.3,85.2
NetJ10_3: J10.3 R32.1 R35.1 | length 5.4
  Bottom Layer w0.35: R32.1@61.2,82.9 R35.1@61.2,84.2 J10.3@65.3,84.2
NetJ10_4: J10.4 R34.1 R37.1 | length 11.2
  Bottom Layer w0.35: R37.1@57.2,84.2 R34.1@57.2,82.9 57.2,81.9 57.5,81.6 62.2,81.6 63.8,83.2 J10.4@65.3,83.2
NetR3_2: R3.2 U2.16 | length 2.5
  Bottom Layer w0.45: U2.16@98.94,99.25 98.94,101.64 R3.2@99,101.7
NetR4_2: R4.2 U2.15 | length 2.5
  Bottom Layer w0.45: U2.15@97.67,99.25 97.67,101.67 R4.2@97.7,101.7
NetR5_1: R5.1 U2.2 | length 69.8
  Bottom Layer w0.45: U2.2@100.21,89.45 100.21,84.09 101.7,82.6 108.246,82.6 113.5,77.346 R5.1@113.5,29
NetR5_2: R5.2 U1.1 | length 1.5
  Bottom Layer w0.45: R5.2@113.5,27.6 U1.1@114.995,27.6
NetR6_2: R6.2 U2.14 | length 2.4
  Bottom Layer w0.45: U2.14@96.4,99.25 R6.2@96.4,101.7